# Altium PCB 贴锁控制板201028.PcbDoc
Units mm, origin at the board's own origin, x right, y up, seen from the top; angles counter-clockwise.
Board outline 47.43 x 32.39 mm, 2 copper layers (Top Layer, Bottom Layer); 73 components, 53 nets, 222 pads, 181 vias.
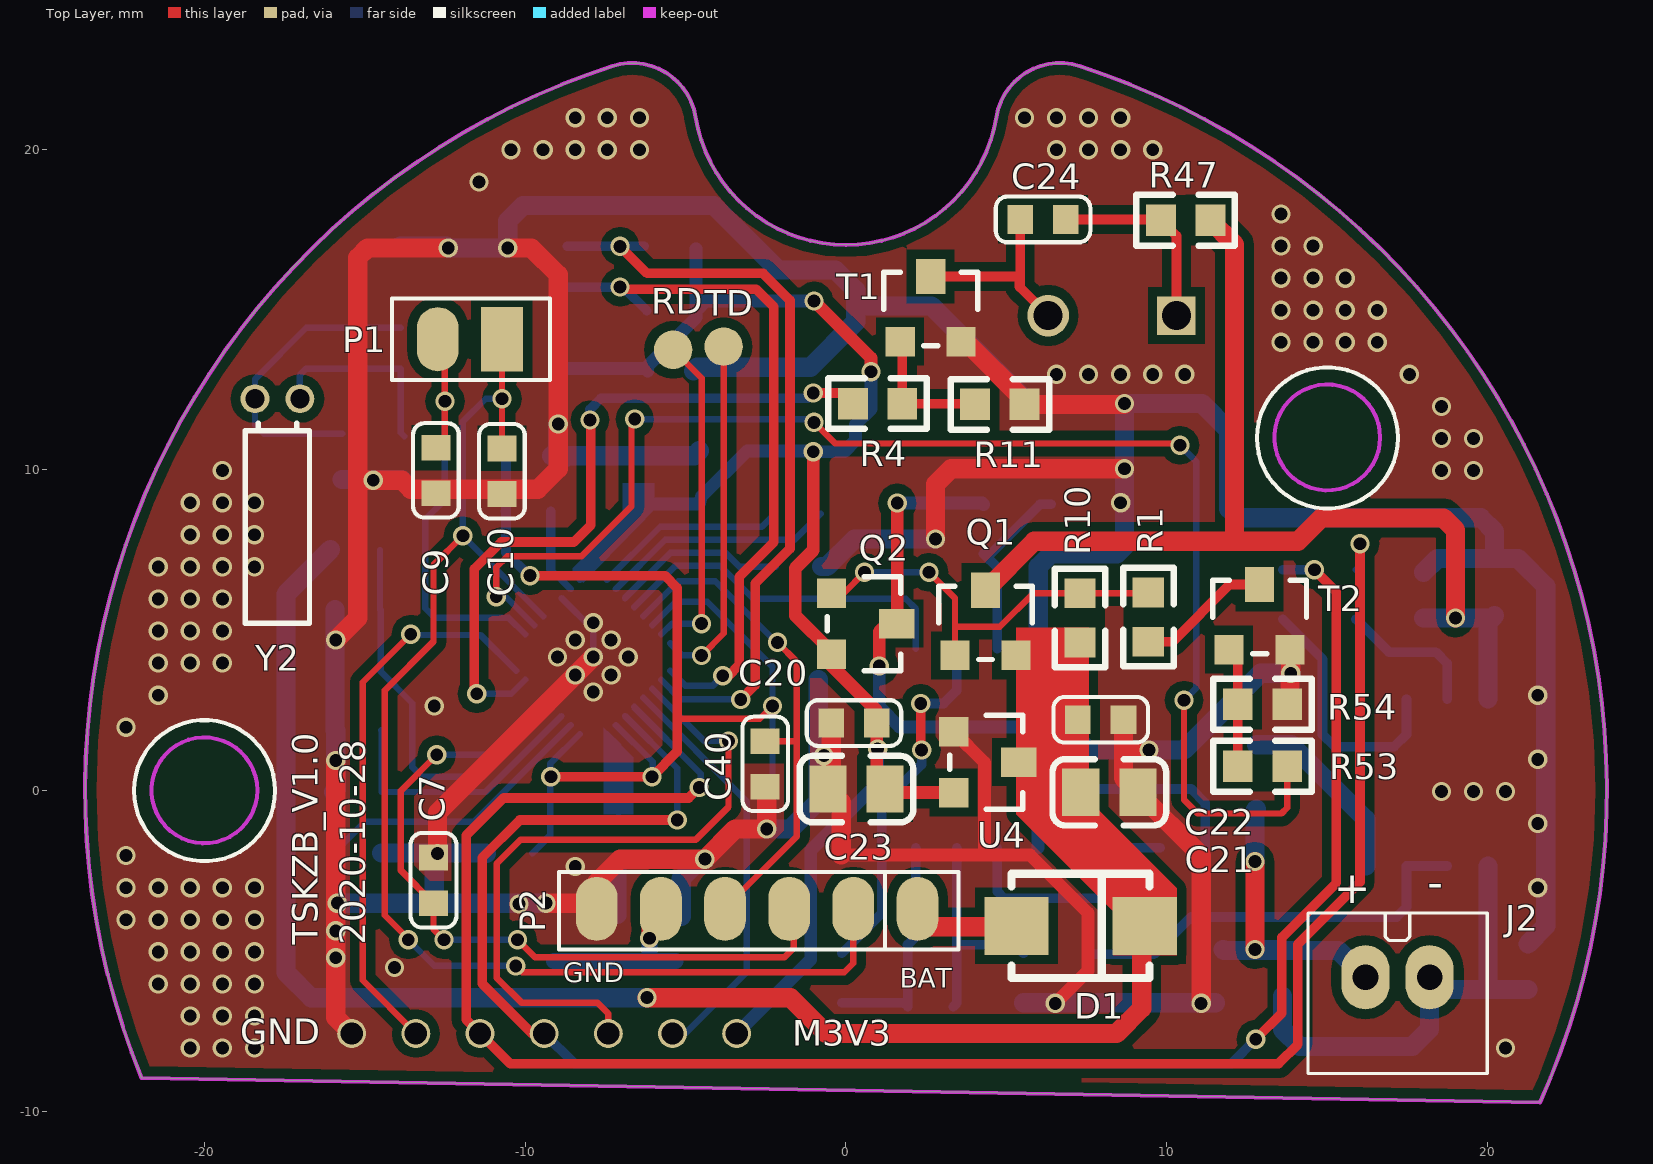
[diagram p0: Top Layer view]
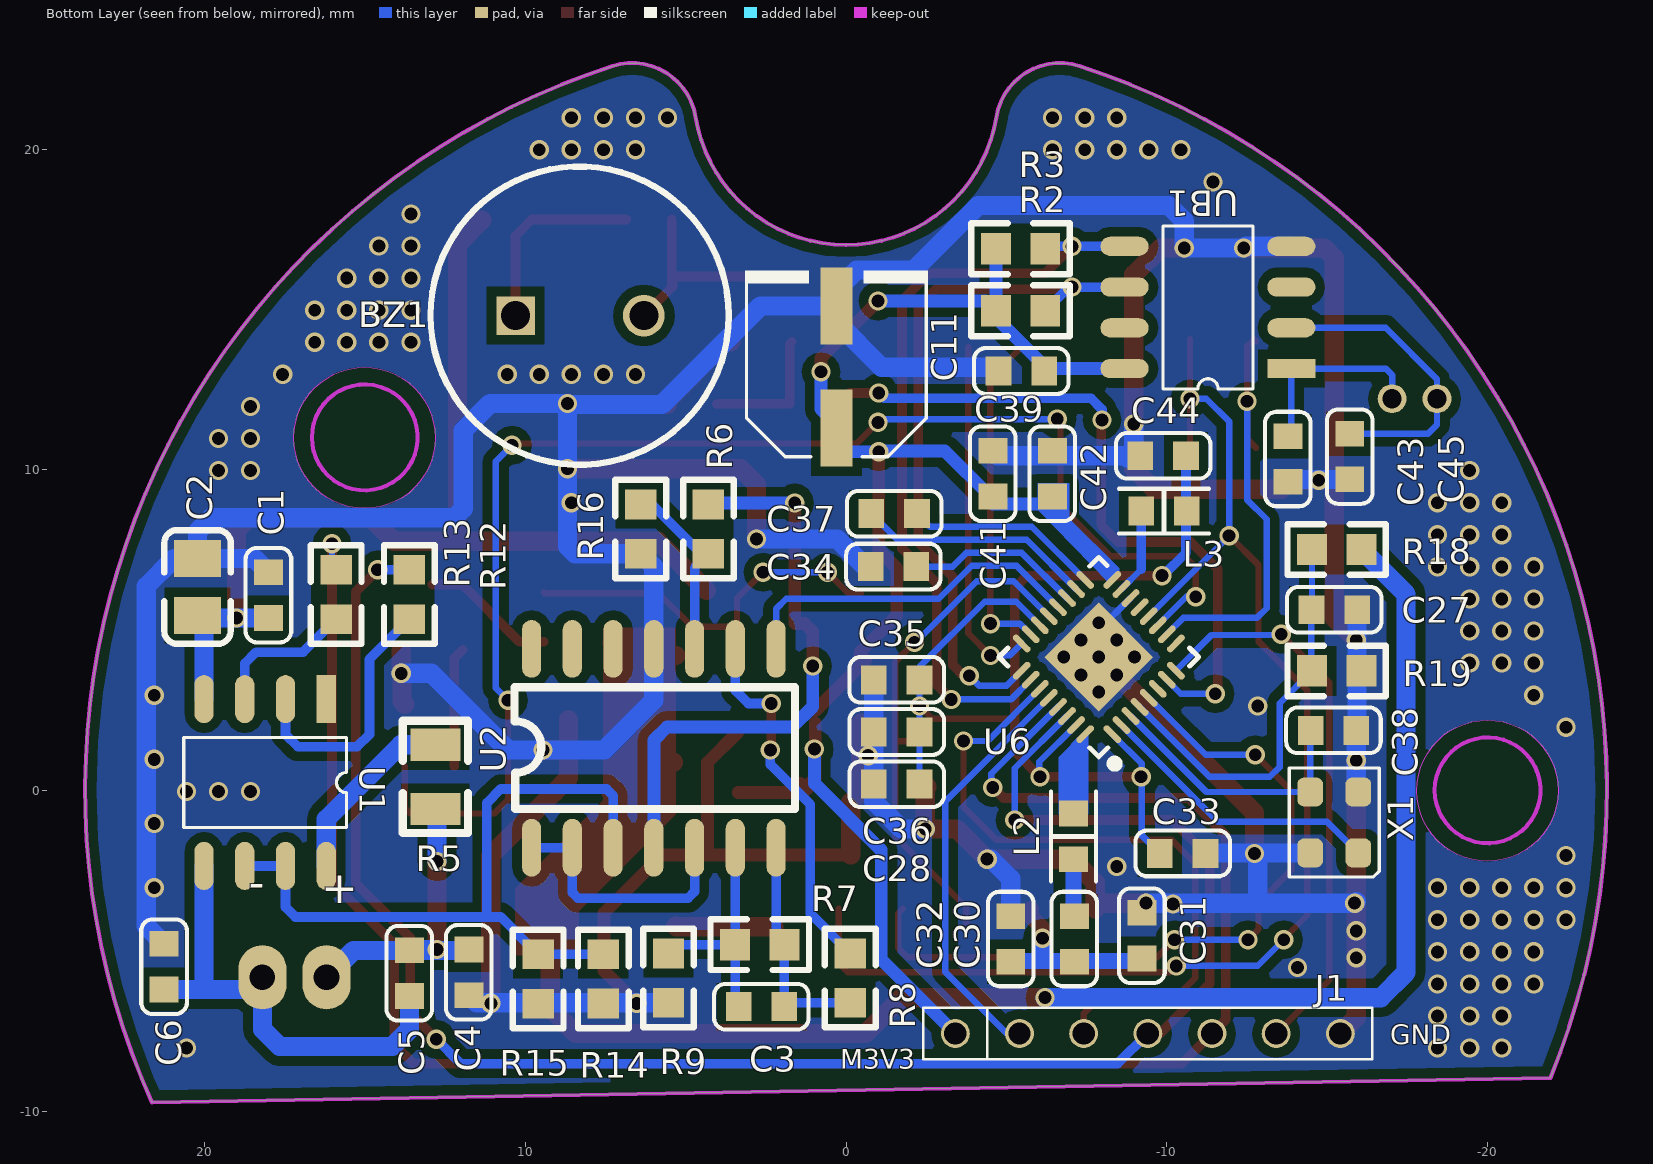
[diagram p1: Bottom Layer view, seen from below]
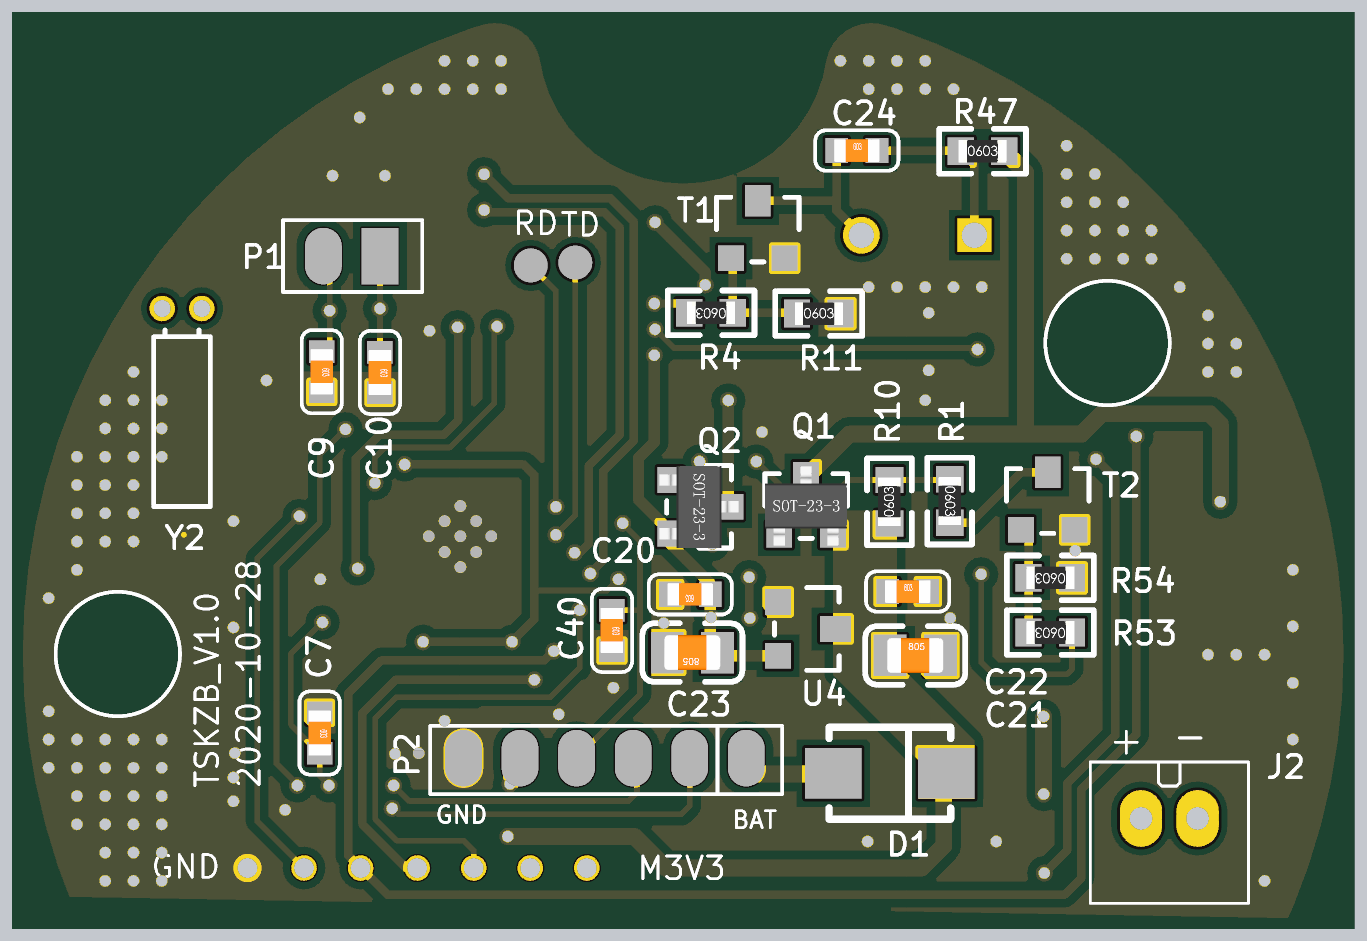
[diagram p2: 3D render of the assembled board from above, using the file's embedded part models]
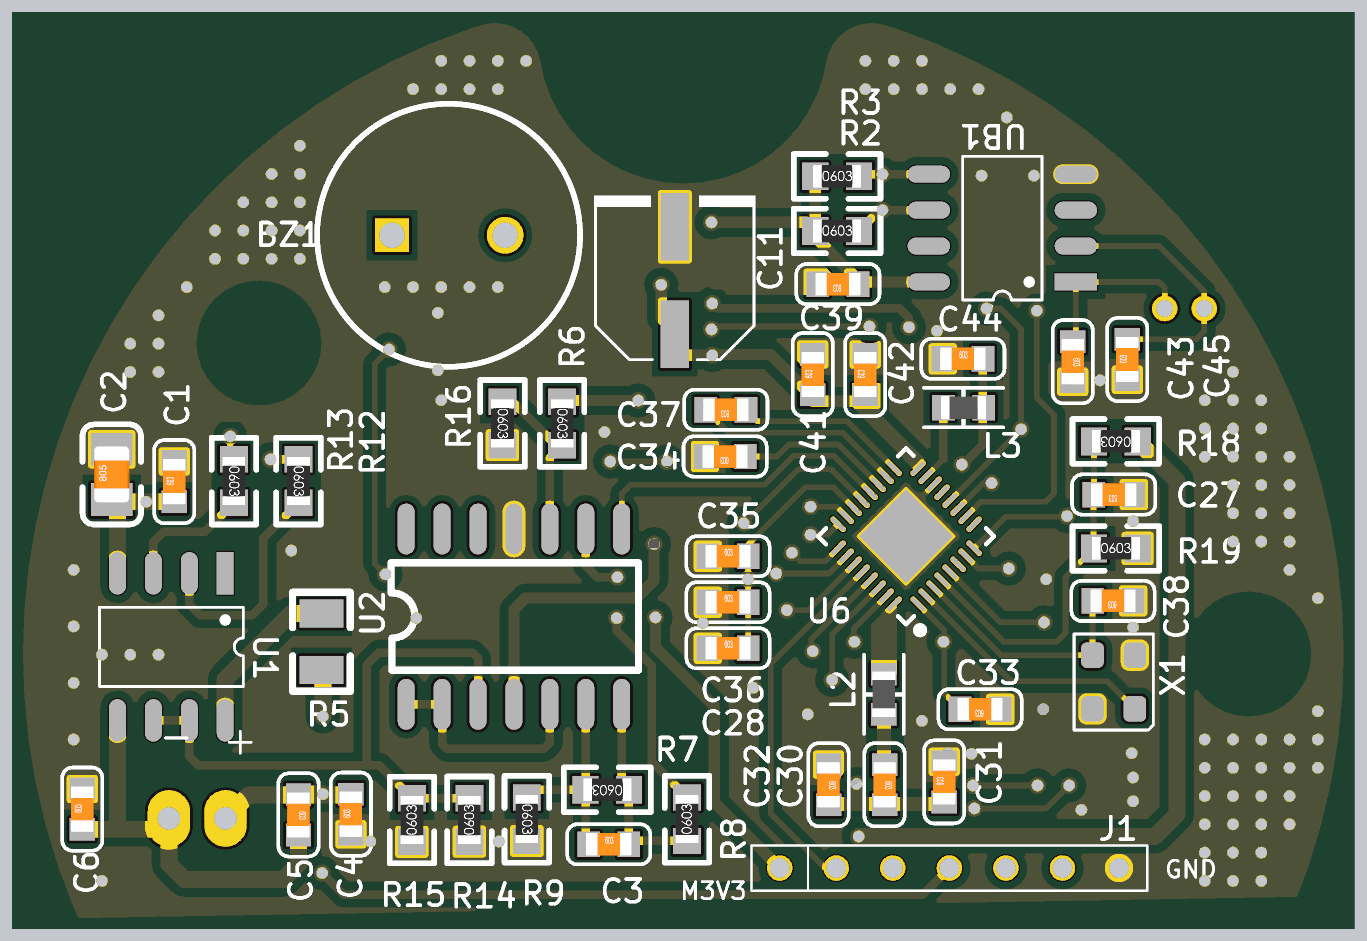
[diagram p3: 3D render of the assembled board from below, using the file's embedded part models]

## Layer stack, top to bottom
Top Layer: signal copper 0.0356
Dielectric: dielectric 0.32, FR-4, Dk 4.8
Bottom Layer: signal copper 0.0356

## Board outline
-21.952,-8.954 21.636,-9.715 ccw(c0.005,0.012) 7.281,22.585 ccw(c6.668,20.681) 4.694,21.001 cw(c0.005,21.762) -4.684,21.001 ccw(c-6.658,20.681) -7.272,22.585 ccw(c0.005,0.012)

## Design rules (kind name [scope] priority, off if disabled: settings)
Clearance Clearance_1 [All] p1 off: gap=0.3
Clearance [All] p2: gap=0.2
HoleToHoleClearance [All] p1: gap=0 allowstackedmicrovias=TRUE
MinimumSolderMaskSliver [All] p1: minsoldermaskwidth=0
PolygonConnect [All] p1: connectstyle=Direct reliefconductorwidth=0.254 reliefentries=4 polygonreliefangle="90 Angle" airgapwidth=0.254
RoutingVias [All] p1: holewidth=0.4 width=0.6 viastyle="Through Hole" minholewidth=0.3 minwidth=0.5 maxholewidth=0.4 maxwidth=0.6
SilkToSilkClearance [All] p1: silktosilkclearance=0
SilkToSolderMaskClearance [IsPad] p1: minsilkscreentomaskgap=0 clearancetoexposedcopper=TRUE
SolderMaskExpansion [All] p1: expansion=0.102
Width [All] p1: maxlimit=1.5 minlimit=0.1 preferedwidth=0.3
24 further rules are at their usual default settings.

## Components (designator, comment, footprint, x,y, rotation, side; value= is the part's Value field where it differs from the comment)
BZ1 "BUZZER" BUZZER_D93_L40 8.306,14.808 r180 bottom
C1 "0.1uF" 0603C 18.009,6.096 r90 bottom
C2 "22uF" LC-0805_C 20.218,6.35 r90 bottom
C3 "0.1uF" 0603C 2.642,-6.731 r180 bottom
C4 "100nF" 0603C 11.76,-5.664 r90 bottom
C5 "100nF" 0603C 13.614,-5.69 r270 bottom
C6 "100nF" 0603C 21.26,-5.486 r90 bottom
C7 "100nF" 0603C -12.852,-2.794 r270 top
C9 "100nF" 0603C -12.776,9.982 r270 top
C10 "100nF" 0603C -10.719,9.957 r270 top
C11 "220uF" R5*5.8 0.305,13.208 r90 bottom
C20 "0.1uF" 0603C 0.254,2.108 r180 top
C21 "22uF/10V" LC-0805_C 8.212,-0.051 r0 top
C22 "0.1uF" 0603C 7.945,2.21 r0 top
C23 "10uF/10V" LC-0805_C 0.33,0.051 r180 top
C24 "10uF/10V" 0603C 6.147,17.805 r0 top
C27 "1nF" 0603C -15.215,5.639 r0 bottom
C28 "1uF/6.3V" 0603C -1.575,0.203 r180 bottom
C30 "1.5pF" 0603C -7.112,-4.623 r270 bottom
C31 "NC" 0603C -9.22,-4.521 r90 bottom
C32 "1pF" 0603C -5.131,-4.623 r270 bottom
C33 "0.1uF" 0603C -10.49,-1.956 r0 bottom
C34 "0.1uF" 0603C -1.473,6.985 r0 bottom
C35 "1uF" 0603C -1.575,3.454 r180 bottom
C36 "0.1uF" 0603C -1.575,1.829 r180 bottom
C37 "0.1uF" 0603C -1.499,8.636 r0 bottom
C38 "2.7pF" 0603C -15.189,1.88 r0 bottom
C39 "0.1uF" 0603C -5.461,13.081 r0 bottom
C40 "1nF" 0603C -2.515,0.833 r270 top
C41 "10uF/6.3V" 0603C -4.572,9.881 r90 bottom
C42 "0.1uF" 0603C -6.426,9.881 r90 bottom
C43 "22pF" 0603C -13.767,10.338 r270 bottom
C44 "10uF/6.3V" 0603C -9.881,10.439 r180 bottom
C45 "22pF" 0603C -15.697,10.414 r90 bottom
D1 "SS14" DO-214AA 7.315,-4.216 r180 top
J1 "7P" "7P-2.0MM - duplicate" -3.404,-7.569 r180 bottom
J2 "CON2" 2PIN-2.0 17.196,-5.817 r180 top
L2 "2nH" 0603L -7.087,-1.422 r90 bottom
L3 "2.2uH" 0603L -9.906,8.712 r0 bottom
P1 "按键板接口" 2PH-2.0 -10.719,14.072 r180 top
P2 "设置板接口" B6B-PH 2.235,-3.683 r180 top
Q1 "SI2301" "SOT-23 - GDS" 4.351,5.232 r0 top
Q2 "SI2301" "SOT-23 - GDS" 0.567,5.207 r270 top
R1 "1K" LC-0603_R 9.431,5.41 r270 top
R2 "10K" LC-0603_R -5.436,14.961 r180 bottom
R3 "10K" LC-0603_R -5.436,16.891 r180 bottom
R4 "1K" LC-0603_R 0.991,12.065 r180 top
R5 "2.2R" 0805_R 12.802,0.432 r90 bottom
R6 "10K" LC-0603_R 4.293,8.153 r270 bottom
R7 "100K" LC-0603_R 2.692,-4.801 r0 bottom
R8 "100K" LC-0603_R -0.127,-5.842 r90 bottom
R9 "10K" LC-0603_R 5.537,-5.842 r270 bottom
R10 "100K" LC-0603_R 7.298,5.385 r90 top
R11 "10K" LC-0603_R 4.801,12.04 r0 top
R12 "10K" LC-0603_R 13.614,6.115 r270 bottom
R13 "10K" LC-0603_R 15.897,6.115 r270 bottom
R14 "0R68" LC-0603_R 7.569,-5.867 r90 bottom
R15 "0R68" LC-0603_R 9.601,-5.871 r90 bottom
R16 "100K" LC-0603_R 6.401,8.153 r270 bottom
R18 "500K%1" LC-0603_R -15.291,7.518 r0 bottom
R19 "100K%1" LC-0603_R -15.291,3.734 r180 bottom
R47 "10R" LC-0603_R 10.592,17.78 r0 top
R53 "1K" LC-0603_R 12.987,0.762 r180 top
R54 "10K" LC-0603_R 12.987,2.692 r180 top
T1 "SS8050" SOT-23-3L 2.642,15.011 r0 top
T2 "PMBT3904" SOT-23-3L 12.895,5.41 r0 top
U1 "CP2117" SOP8 18.11,0.254 r270 bottom
U2 "LMV324B-SR" SOIC-14_L8.7-W3.9-P1.27-LS6.0-BL 5.994,1.321 r180 bottom
U4 "HT7533" SOT-23-3L 4.377,0.889 r270 top
U6 "BK3431Q" QFN32_4*4*0.4 -7.874,4.166 r45 bottom
UB1 "PCF8563" SOP8 -11.278,15.062 r0 bottom
X1 "16MHZ" XTAL3225 -15.215,-0.991 r90 bottom
Y2 "32.768KHZ" 晶振-9 -17.018,12.217 r180 top

## Footprints (in the part's own frame and the unit in brackets; to place one, negate y for a bottom-side part, rotate by r counter-clockwise, add the part's x,y. Pads: shape width x height; smd on the part's side, far side on the other; paste and mask are expansions set on the pad)
2PH-2.0 [mm]
  rect 1.3x2 smd mask+0.05: 1(0,0)
  oval 1.3x2 smd mask+0.05: 2(2,0)
  silkscreen extent -1.5,-1.27 3.43,1.27
2PIN-2.0 [mm]
  oval 1.5x2 hole 0.8: 1(-1,0) 2(1,0)
  silkscreen extent -2.8,-2 2.79,3
"7P-2.0MM - duplicate" [mm]
  round 0.9 hole 0.7 mask+0.05: 1(0,0) 2(2,0) 3(4,0) 4(6,0) 5(8,0) 6(10,0) 7(12,0)
  silkscreen extent -1,-0.8 13,0.8
0603C [mm]
  rect 0.8x0.9 smd: 1(-0.711,0) 2(0.711,0)
  silkscreen extent -1.47,-0.71 1.47,0.71, body extent -0.8,-0.4 0.8,0.4, height 0.3
0603L [mm]
  rect 0.8x0.9 smd: 1(-0.711,0) 2(0.711,0)
  silkscreen extent -1.4,-0.7 1.4,0.7, body extent -0.82,-0.41 0.82,0.41, height 0.46
0805_R [mm]
  rect 1x1.55 smd: 1(-1,0) 2(1,0)
  silkscreen extent -1.75,-1.02 1.75,1.02
B6B-PH [mm]
  oval 1.3x2 smd mask+0.05: 1(0,0) 2(2,0) 3(4,0) 4(6,0) 5(8,0) 6(10,0)
  silkscreen extent -1.27,-1.14 11.18,1.27
BUZZER_D93_L40 [mm]
  rect 1.2x1.2 hole 0.9: 1(-2,0)
  round 1.3 hole 0.9: 2(2,0)
  silkscreen extent -4.65,-4.65 4.65,4.65
DO-214AA [mm]
  rect 2x1.8 smd: 1(2,0) 2(-2,0)
  silkscreen extent -2.15,-1.63 2.15,1.63
LC-0603_R [mm]
  rect 0.93x0.98 smd: 1(-0.77,0) 2(0.77,0)
  silkscreen extent -1.53,-0.79 1.54,0.79, body extent -0.85,-0.4 0.85,0.4, height 0.56
LC-0805_C [mm]
  rect 1.16x1.47 smd: 1(-0.89,0) 2(0.89,0)
  silkscreen extent -1.77,-1.04 1.77,1.04, body extent -1,-0.62 1,0.63, height 0.77
QFN32_4*4*0.4 [mm]
  rect 2.4x2.4 smd paste-0.025 mask+0.051: 0(0,0)
  oval 0.7x0.2 smd paste-0.025 mask+0.051: 1(-2,1.4) 2(-2,1) 3(-2,0.6) 4(-2,0.2) 5(-2,-0.2) 6(-2,-0.6) 7(-2,-1) 8(-2,-1.4) 17(2,-1.4) 18(2,-1) 19(2,-0.6) 20(2,-0.2) 21(2,0.2) 22(2,0.6) 23(2,1) 24(2,1.4)
  oval 0.2x0.7 smd paste-0.025 mask+0.051: 9(-1.4,-2) 10(-1,-2) 11(-0.6,-2) 12(-0.2,-2) 13(0.2,-2) 14(0.6,-2) 15(1,-2) 16(1.4,-2) 25(1.4,2) 26(1,2) 27(0.6,2) 28(0.2,2) 29(-0.2,2) 30(-0.6,2) 31(-1,2) 32(-1.4,2)
  silkscreen extent -2.82,-2.2 2.2,2.2
R5*5.8 [mm]
  rect 2.4x1 smd: 1(-1.9,0) 2(1.9,0)
  silkscreen extent -2.8,-2.85 3,2.85
SOIC-14_L8.7-W3.9-P1.27-LS6.0-BL [mm]
  oval 0.6x1.798 smd: 1(-3.81,-3.1) 2(-2.54,-3.1) 3(-1.27,-3.1) 4(0,-3.1) 5(1.27,-3.1) 6(2.54,-3.1) 7(3.81,-3.1) 8(3.81,3.1) 9(2.54,3.1) 10(1.27,3.1) 11(0,3.1) 12(-1.27,3.1) 13(-2.54,3.1) 14(-3.81,3.1)
  silkscreen extent -4.34,-1.9 4.4,1.91
SOP8 [mm]
  rect 1.5x0.6 smd mask+0.05: 1(-2.6,1.905)
  oval 1.5x0.6 smd mask+0.05: 2(-2.6,0.635) 3(-2.6,-0.635) 4(-2.6,-1.905) 5(2.6,-1.905) 6(2.6,-0.635) 7(2.6,0.635) 8(2.6,1.905)
  round 0.4 on Bottom Overlay mask+0.05: ""(-0.949,1.905)
  silkscreen extent -1.4,-2.54 1.4,2.54
"SOT-23 - GDS" [mil]
  rect 36x43.31 smd: D(0,40)
  rect 36x36 smd: G(-37.4,-40) S(37.4,-40)
  silkscreen extent -57,-45 58,45, body extent -57,-55 57,55, height 47
SOT-23-3L [mil]
  rect 36x36 smd: 1(-37.4,-40) 2(37.4,-40)
  rect 36x43.31 smd: 3(0,40)
  silkscreen extent -57,-45 58,45
XTAL3225 [mm]
  rrect50% 0.9x0.8 smd: 1(-0.95,-0.75) 2(0.95,-0.75) 3(0.95,0.75) 4(-0.95,0.75)
  silkscreen extent -1.7,-1.4 1.7,1.4
晶振-9 [mm]
  round 0.9 hole 0.6: 1(0,0) 2(1.4,0)
  rect 0x0 smd: 3(0.635,8)
  silkscreen extent -0.3,0.76 1.7,7

## Part data
BZ1: "Buzzer"
C1 C2 C3 C11 C20 C22 C27: library part CAP-NP, "Capacitor, Ceramic"
C4 C5 C6 C7 C9 C10: library part "CAP NP"
C21 C23: library part CAP-P, "Capacitor, tolerance ±20%"
C24: library part C_0_Dup1
C28 C30 C31 C32 C33 C34 C35 C36 C37 C38 C41 C42 C44: library part Cap, "Capacitor"
C39 C40 C43 C45: library part C
D1: library part D
L2 L3: "Power Inductor, 4.7uH, 0.7A, 260mR DCR"
P1: library part MHDR1X2, "Header, 2-Pin"
P2: library part "Header 6", "Header, 6-Pin"
Q1 Q2: library part PWRMOSFET_EP_DGS_0
R1 R6 R10 R16 R53 R54: library part R
R2 R3: library part RES
R4 R5 R11 R14 R15 R47: library part R_Dup1
R7 R8 R9 R12 R13: library part Pro71C3.TMP_UnNamed_1
R18 R19: library part Res2, "Resistor"
T1 T2: library part NPN_BJT, "Bipolar Junction Transistor"
U1: library part AM24LC02_0
U4: library part XC6206P302M
UB1: library part IC8
Y2: library part 晶振

## Free pads (board coordinates)
  round 1.2 smd: 0(-3.81,13.843) 1(-5.385,13.741)

## Via types
v1: diameter 0.6, hole 0.4, Top Layer to Bottom Layer, tented both sides, 181 vias

## Nets (pads, with @x,y where several pads share a name; then routed paths per layer and width w, separated by ;. In a path a pad name is that pad's centre, name@x,y a point inside that pad or via, vN(x,y) a via of type N, cw(c..) or ccw(c..) an arc to the next point about the centre after c; other vN are vias at no path point)
BAT_ADC: C27.2 R18.2 R19.1 U6.4 | length 12.6
  Bottom Layer w0.2: C27.2@-14.521,5.639 R18.2@-14.521,7.493 ; C27.2 -14.503,3.751 R19.1 -13.513,2.726 -13.513,0.737 -13.208,0.432 -11.325,0.432 U6.4
BEEP: R4.2 U6.7 | length 21.9
  Top Layer w0.3: v1(-11.506,3.023) -11.582,3.099 -11.582,6.91 -10.741,7.752 -8.479,7.752 -7.95,8.28 v1@-7.95,11.532 ; v1(-1.016,12.395) -0.11,12.395 R4.2
  Bottom Layer w0.2: v1(-11.506,3.023) -10.431,3.023 U6.7
  Bottom Layer w0.3: v1(-7.976,11.557) -7.976,11.887 -7.63,12.232 -1.179,12.232 v1(-1.016,12.395)
DECT_L_R: U6.6
EN_FAULT: U2.8 U6.20 | length 11.1
  Bottom Layer w0.2: U6.20 -5.312,7.01 -3.912,7.01 -2.886,5.985 1.864,5.985 2.184,5.664 U2.8
GND: C1.2 C2.2 C4.1 C6.2 C7.1 C9.2 C10.2 C11.2 C20.2 C21.2 C22.2 C23.2 C27.1 C28.1 C31.2 C32.1 C33.1 C34.2 C35.1 C36.1 C38.1 C39.2 C40.2 C41.2 C42.2 C43.2 C44.1 C45.1 J1.7 P2.6 R9.2 R11.2 R14.1 R15.1 R16.2 R19.2 R54.1 T1.2 T2.2 U2.11 U4.1 U6.0 U6.14 UB1.4 X1.2 X1.4 | length 232.3
  Top Layer w0.4: -0.146,-2.007 4.318,-2.007 ; U4.1 4.318,0.882 4.318,-2.007 ; v1(6.528,-6.629) 7.544,-5.613 7.544,-3.81 5.74,-2.007 4.318,-2.007
  Top Layer w0.6: v1(-15.9,0.94) v1@-15.9,-3.454 ; v1(-15.9,4.699) -15.215,5.385 -15.215,9.703 ; v1(-15.85,-3.505) v1@-15.9,-3.454 ; J1.7 -15.9,-7.072 v1@-15.9,-3.454 ; v1(-12.725,-1.956) -12.725,-0.686 v1(-8.433,3.607) v1(-7.874,4.166) ; v1(-12.395,16.916) -14.91,16.916 -15.215,16.612 -15.215,9.703 ; v1(-10.541,16.916) -9.804,16.916 -8.966,16.078 v1(-8.966,11.43) -8.966,10.033 -9.601,9.398 -13.564,9.398 -13.843,9.677 v1(-14.732,9.677) -15.189,9.677 -15.215,9.703 ; v1(-9.347,-3.505) -7.943,-3.505 P2.6 -7.765,-2.863 -7.036,-2.134 v1(-4.394,-2.134) -3.454,-1.194 v1(-2.464,-1.194) -2.464,0.071 C40.2 ; C20.2 -0.457,0.153 C23.2 -0.146,-0.363 -0.146,-2.007 ; v1(2.794,7.849) 2.794,9.55 3.277,10.033 v1(8.687,10.033) ; T1.2 3.737,13.995 5.571,12.162 R11.2 8.661,12.04 v1(8.687,12.065) ; C22.2 8.656,1.245 ; v1(9.449,1.27) 8.681,1.27 8.656,1.245 ; v1(11.074,-6.629) 11.074,-2.023 C21.2 8.656,0.396 8.656,1.245 ; R54.1 13.845,2.78 v1@13.845,3.658 ; v1(13.868,3.658) T2.2@13.868,4.371
  Bottom Layer w0.2: U6.14 -7.874,5.014 v1(-7.874,4.166)
  Bottom Layer w0.6: X1.2 -15.9,0.024 v1(-15.9,0.94) C38.1 ; C38.1@-15.926,1.88 C27.1 ; v1@-15.9,-3.454 v1(-15.85,-3.505) -12.929,-3.505 ; C45.1 -13.843,9.703 C43.2 ; X1.4 v1@-12.827,-1.941 ; UB1.4 -12.446,16.967 v1(-12.395,16.916) v1(-10.541,16.916) -10.541,17.755 -10.058,18.237 -4.115,18.237 -2.108,16.231 -0.33,16.231 0.305,15.596 C11.2 ; C33.1 -11.217,-1.941 v1@-12.827,-1.941 ; v1(-9.347,-3.505) -12.929,-3.505 ; C44.1 -8.966,10.643 v1(-8.966,11.43) ; C44.1@-8.788,10.363 -8.712,10.439 -4.724,10.439 C41.2 ; C32.1 -5.131,-2.743 -4.521,-2.134 v1(-4.394,-2.134) ; C39.2 -4.636,13.195 -1.105,13.195 0.305,14.605 C11.2 ; v1(-2.464,-1.194) -1.727,-1.194 -0.864,-0.33 C28.1 C36.1 C35.1 ; C34.2 -0.584,6.985 0.279,7.849 v1(2.794,7.849) ; R9.2 6.51,-6.612 v1(6.528,-6.629) ; v1@6.528,-6.612 C4.1@11.524,-6.612 ; v1(13.868,3.658) 12.929,3.658 10.541,1.27 v1(9.449,1.27) 7.544,1.27 5.994,2.819 U2.11 5.994,6.977 R16.2 8.45,7.383 8.687,7.62 v1(8.687,10.033) v1(8.687,12.065) ; C1.2 18.441,7.24 C2.2 ; C6.2 21.819,-4.216 21.819,6.375 20.954,7.24 C2.2 ; -12.929,-3.505 -12.827,-3.404 v1@-12.827,-1.941 ; C11.2 2.672,15.108 5.74,12.04 8.661,12.04 v1(8.687,12.065) ; v1(8.687,12.065) 11.1,12.065 11.938,11.227 11.938,8.788 12.217,8.509 19.787,8.509 20.218,8.077 C2.2
  other v1: -20.435,-8.024 -19.435,-8.024 -18.435,-8.024 20.565,-8.024 -20.435,-7.024 -19.435,-7.024 -18.435,-7.024 -21.435,-6.024 -20.435,-6.024 -19.435,-6.024 -18.435,-6.024 -14.072,-5.512 -15.9,-5.207 -21.435,-5.024 -20.435,-5.024 -19.435,-5.024 -18.435,-5.024 -15.9,-4.369 -22.435,-4.024 -21.435,-4.024 -20.435,-4.024 -19.435,-4.024 -18.435,-4.024 -10.185,-3.531 -22.435,-3.024 -21.435,-3.024 -20.435,-3.024 -19.435,-3.024 -18.435,-3.024 21.565,-3.024 -8.433,-2.362 -22.435,-2.024 21.565,-1.024 18.565,-0.024 19.565,-0.024 20.565,-0.024 21.565,0.976 -0.686,1.092 -22.435,1.976 -12.827,2.642 -21.435,2.976 21.565,2.976 -7.874,3.073 -7.315,3.607 -21.435,3.976 -20.435,3.976 -19.435,3.976 -8.992,4.166 -6.782,4.166 -8.433,4.699 -7.315,4.699 -21.435,4.976 -20.435,4.976 -19.435,4.976 -7.874,5.232 -21.435,5.976 -20.435,5.976 -19.435,5.976 -21.435,6.976 -20.435,6.976 -19.435,6.976 -18.435,6.976 -20.435,7.976 -19.435,7.976 -18.435,7.976 -20.435,8.976 -19.435,8.976 -18.435,8.976 8.565,8.976 -19.435,9.976 18.565,9.976 19.565,9.976 18.565,10.976 19.565,10.976 18.565,11.976 6.565,12.976 7.565,12.976 8.565,12.976 9.565,12.976 10.565,12.976 17.565,12.976 13.565,13.976 14.565,13.976 15.565,13.976 16.565,13.976 13.565,14.976 14.565,14.976 15.565,14.976 16.565,14.976 13.565,15.976 14.565,15.976 15.565,15.976 13.565,16.976 14.565,16.976 13.565,17.976 -11.435,18.976 -10.435,19.976 -9.435,19.976 -8.435,19.976 -7.435,19.976 -6.435,19.976 6.565,19.976 7.565,19.976 8.565,19.976 9.565,19.976 -8.435,20.976 -7.435,20.976 -6.435,20.976 5.565,20.976 6.565,20.976 7.565,20.976 8.565,20.976
KEYX_4: C10.1 P1.1 P2.2 U6.12 | length 42
  Top Layer w0.2: v1@-13.627,-4.635 -14.376,-3.886 -14.376,3.124 -12.852,4.648 -12.852,7.032 v1(-11.938,7.947) ; C10.1 v1(-10.719,12.217) P1.1 ; v1(-10.287,-5.461) -10.084,-5.664 -0.051,-5.664 0.235,-5.378 P2.2
  Bottom Layer w0.2: v1(-13.64,-4.648) -12.827,-5.461 v1(-10.287,-5.461) ; v1(-10.719,12.217) -11.227,12.217 -11.938,11.506 v1(-11.938,7.947) U6.12
KEYY_1: C7.2 P2.3 U6.5 | length 23.4
  Top Layer w0.2: v1(-12.751,1.118) -13.868,0 -13.868,-2.489 C7.2 -12.852,-4.318 v1(-12.522,-4.648) ; v1(-10.236,-4.648) -9.686,-5.198 -1.922,-5.198 -1.626,-4.902 -1.626,-3.822 P2.3
  Bottom Layer w0.2: v1(-12.751,1.118) -11.205,1.118 U6.5 ; v1(-12.522,-4.648) v1(-10.236,-4.648)
KEYY_3: C9.1 P1.2 U6.10 | length 13.8
  Top Layer w0.2: C9.1 -12.497,10.973 v1(-12.497,12.141) -12.497,13.85 P1.2 P1.2@-12.776,14.014
  Bottom Layer w0.2: v1(-12.497,12.141) -12.497,9.068 -13.106,8.458 -13.106,5.69 -12.802,5.385 -10.507,5.385 U6.10
M3V3: C11.1 C20.1 C23.1 C39.1 C41.1 C42.1 J1.1 Q2.S R2.1 R3.1 U4.2 U6.16 UB1.8 | length 51.9
  Top Layer w0.4: v1(-1.016,10.566) -1.016,7.493 -1.575,6.934 -1.575,5.46 -0.449,4.335 Q2.S ; v1(-0.991,15.265) 0.787,13.487 v1(0.787,13.056) ; Q2.S@-0.433,4.241 -0.61,4.064 C20.1@0.965,2.489 ; C20.1 0.965,0.39 1.22,0.135 C23.1 1.332,-0.061 U4.2 ; C23.1@1.279,0.076 C23.1@1.427,0.225
  Bottom Layer w0.2: U6.16 -6.426,8.442 C42.1
  Bottom Layer w0.3: C39.1@-6.256,13.157 C39.1@-6.206,13.106
  Bottom Layer w0.4: UB1.8 -6.256,13.157 C39.1@-6.248,13.157 ; C42.1 -6.198,8.941 -4.572,8.941 -4.496,9.169 -3.073,10.592 -1.041,10.592 v1(-1.016,10.566) -0.051,10.566 0.305,10.922 C11.1 0.305,11.41 0.787,11.892 v1(0.787,13.056) ; C39.1 -6.172,13.241 -4.666,14.748 R2.1 ; R3.1 R2.1 ; J1.1 -1.092,-5.258 -1.092,-1.854 0.991,0.229 v1(0.991,1.295) ; v1(-0.991,15.265) -4.361,15.265 R2.1
MOTO+: C4.2 C5.1 J2.2 R5.1 | length 10.1
  Top Layer w0.6: v1(12.751,-4.953) v1(12.751,-2.21)
  Bottom Layer w0.6: C4.2 11.786,-4.978 C5.1 ; v1(12.751,-4.953) 13.589,-4.953 C5.1 ; v1(12.751,-2.21) 12.751,-0.619 R5.1 ; J2.2 15.358,-4.978 C5.1
MOTO-: C5.2 C6.1 J2.1 U1.5 | length 14.8
  Bottom Layer w0.6: C5.2 13.614,-7.442 14.148,-7.976 17.653,-7.976 18.196,-7.433 J2.1 18.577,-6.198 20.142,-6.198 ; U1.5 20.015,-6.071 20.142,-6.198 ; C6.1 20.142,-6.198
NetBZ1_1: BZ1.1 C24.2 R47.1 | length 6.1
  Top Layer w0.3: C24.2 9.796,17.805 R47.1 10.306,17.296 BZ1.1
NetBZ1_2: BZ1.2 C24.1 T1.3 | length 6.5
  Top Layer w0.3: T1.3 5.41,16.027 5.41,15.704 5.436,15.678 ; C24.1 5.436,15.678 ; BZ1.2 5.436,15.678
NetC3_1: C3.1 R7.2 R9.1 U2.6 | length 7.2
  Bottom Layer w0.3: C3.1 3.454,-6.629 U2.6 ; R7.2 5.266,-4.801 R9.1
NetC3_2: C3.2 R7.1 R8.1 U2.7 | length 7.2
  Bottom Layer w0.3: R8.1 1.811,-6.612 C3.2 1.93,-4.809 R7.1 ; R7.1@1.93,-4.801 1.93,-4.793 2.184,-4.539 U2.7
NetC30_1: C30.1 L2.1 | length 1.8
  Bottom Layer w0.5: C30.1 -7.087,-3.886 L2.1
NetC34_1: C34.1 U6.19 | length 5.5
  Bottom Layer w0.2: U6.19 -5.478,7.41 -3.746,7.41 -3.321,6.985 C34.1
NetC37_1: C37.1 U6.17 | length 6.1
  Bottom Layer w0.2: U6.17 -5.79,8.23 -2.616,8.23 C37.1
NetC37_2: C37.2 U6.18 | length 7.4
  Bottom Layer w0.2: U6.18 -5.631,7.823 -1.6,7.823 C37.2
NetC38_2: C38.2 U6.3 X1.3 | length 8.5
  Bottom Layer w0.2: C38.2 -14.465,1.866 X1.3 -11.232,-0.041 U6.3
NetC43_1: C43.1 UB1.1 Y2.1 | length 6.1
  Bottom Layer w0.2: Y2.1 -17.018,12.954 -16.815,13.157 UB1.1 -13.878,11.16 C43.1
NetC45_2: C45.2 UB1.2 Y2.2 | length 9.5
  Bottom Layer w0.2: C45.2 -18.136,11.125 -18.418,11.408 Y2.2 -18.418,12.824 -16.815,14.427 UB1.2
NetD1_1: D1.1 P2.1 | length 3.1
  Top Layer w0.6: P2.1@2.261,-4.242 5.29,-4.242 D1.1
NetL2_2: L2.2 U6.32 | length 2.6
  Bottom Layer w0.2: U6.32 -7.087,1.398 L2.2
NetL3_2: L3.2 U6.15 | length 2.7
  Bottom Layer w0.2: -9.195,6.901 U6.15
  Bottom Layer w0.3: -9.195,6.901 L3.2
NetQ1_G: Q1.G Q2.G R1.1 R10.2 | length 12.7
  Top Layer w0.2: Q2.G -0.066,6.157 v1(0.584,6.807) ; v1(2.591,6.807) 3.401,5.997 3.401,5.103 ; Q1.G 3.401,5.103 ; R1.1 9.406,6.155 R10.2 5.85,6.155 4.801,5.105 3.404,5.105 3.401,5.103
  Bottom Layer w0.2: v1(0.584,6.807) v1(2.591,6.807)
NetR1_2: R1.2 T2.3 | length 4.2
  Top Layer w0.3: R1.2 10.177,4.64 11.963,6.426 T2.3
NetR4_1: R4.1 R11.1 T1.1 | length 4.2
  Top Layer w0.3: T1.1 1.761,13.926 R4.1 4.005,12.065 R11.1
NetR5_2: R5.2 U1.8 | length 5.8
  Bottom Layer w0.6: R5.2 13.884,1.432 16.205,-0.889 U1.8
NetR6_2: R6.2 R16.1 U2.10 | length 5.9
  Bottom Layer w0.3: U2.10 4.724,6.952 R6.2 4.513,7.383 6.053,8.923 R16.1
NetR8_2: R8.2 U2.9 | length 11.4
  Top Layer w0.3: v1(2.337,2.718) 2.337,1.295 v1(2.362,1.27)
  Bottom Layer w0.3: R8.2 1.118,-3.827 1.118,-0.432 2.362,0.813 v1(2.362,1.27) ; v1(2.337,2.718) 3.048,2.718 3.454,3.124 U2.9
NetR12_2: R12.2 U1.2 | length 8.1
  Bottom Layer w0.3: R12.2 14.859,4.1 14.859,1.753 15.24,1.372 17.094,1.372 17.475,1.753 U1.2
NetR13_2: R13.2 U1.3 | length 4.5
  Bottom Layer w0.3: R13.2 16.924,4.318 18.39,4.318 18.745,3.962 U1.3
NetR14_2: R14.2 R15.2 U1.6 U1.7 U2.3 | length 22.4
  Bottom Layer w0.3: U2.3 7.264,-0.152 7.468,0.051 10.77,0.051 11.201,-0.381 11.201,-3.937 ; R14.2 R15.2@9.598,-5.097 ; R15.2 10.765,-3.937 11.201,-3.937 ; U1.6 U1.7 17.475,-3.632 17.17,-3.937 11.201,-3.937
NetR53_2: R53.2 R54.2 T2.1 | length 3.7
  Top Layer w0.3: T2.1 12.217,4.122 R54.2 R53.2
NetU2_1: U2.1 U2.2 U2.5 | length 8
  Bottom Layer w0.3: U2.5 4.724,-3.15 4.928,-3.353 8.357,-3.353 8.534,-3.175 U2.2 U2.1
NetU6_2: U6.2 X1.1 | length 9
  Bottom Layer w0.2: X1.1 -14.989,-0.965 -11.591,-0.965 U6.2
P04/LED_RED: J1.3 U6.27 | length 21.2
  Top Layer w0.2: J1.3 -7.404,-6.947 -7.747,-6.604 -10.109,-6.604 -10.887,-5.826 -10.887,-2.276 -10.135,-1.524 -4.674,-1.524 -3.658,-0.508 v1(-3.658,1.549)
  Bottom Layer w0.2: U6.27 -4.409,1.549 v1(-3.658,1.549)
P05/LED_GREEN: J1.2 U6.28 | length 13
  Bottom Layer w0.2: U6.28 -3.083,-0.343 -3.083,-5.648 -5.004,-7.569 J1.2
P06/MOTO1: J1.5 R13.1 U6.29 | length 61
  Top Layer w0.3: v1(-4.572,0.102) -4.902,-0.229 -10.668,-0.229 -11.837,-1.398 -11.837,-7.136 J1.5 -10.464,-8.509 13.487,-8.509 14.089,-7.907 14.089,-4.783 16.027,-2.845 v1(16.027,7.696)
  Bottom Layer w0.2: U6.29 -4.521,0.53 v1@-4.521,0.102 ; R13.1 16.027,7.015 v1(16.027,7.696)
P07/MOTO0: J1.4 R12.1 U6.30 | length 57
  Top Layer w0.3: J1.4 -9.78,-7.569 -11.337,-6.013 -11.337,-2.09 -10.161,-0.914 v1(-5.258,-0.914) ; v1(12.776,-7.747) 13.589,-6.934 13.589,-4.576 15.291,-2.874 15.291,6.198 v1(14.603,6.885)
  Bottom Layer w0.2: U6.30 -5.258,0.701 v1(-5.258,-0.914) v1@-5.258,-1.092
  Bottom Layer w0.3: J1.4 -8.464,-8.509 12.014,-8.509 v1(12.776,-7.747) ; R12.1 v1(14.603,6.885)
PWR_CTL: R53.1 U6.11 | length 43.7
  Top Layer w0.2: v1(-10.897,6.045) -10.897,6.96 -10.554,7.302 -8.243,7.302 -6.68,8.865 -6.68,11.481 v1(-6.579,11.582) ; v1(-0.991,11.481) -0.33,10.82 10.363,10.82 v1(10.414,10.77) ; v1(10.541,2.819) 10.541,-0.279 10.973,-0.711 13.58,-0.711 13.757,-0.533 R53.1
  Bottom Layer w0.2: v1(-10.897,6.045) -10.602,6.045 U6.11 ; v1(-6.579,11.582) -1.092,11.582 v1(-0.991,11.481) ; v1(10.414,10.77) 10.922,10.262 10.922,3.2 v1(10.541,2.819)
RD1_KEYX_2: pad.1 U6.23 | length 10.3
  Top Layer w0.2: pad.1 -4.496,12.852 v1(-4.496,5.207)
  Bottom Layer w0.2: U6.23 -5.418,5.207 v1(-4.496,5.207)
RSTN: J1.6 U6.8 | length 17.5
  Top Layer w0.2: v1(-13.564,4.877) -15.062,3.378 -15.062,-5.911 J1.6
  Bottom Layer w0.2: v1(-13.564,4.877) -13.538,4.851 -11.388,4.851 U6.8
RX2/SETKEY: C40.1 P2.4 U6.21 | length 16.4
  Top Layer w0.2: P2.4@-3.739,-4.216 -3.739,-3.638 -1.524,-1.422 -1.524,1.524 ; C40.1 -1.545,1.545 -1.524,1.524 ; v1(-2.134,4.623) -1.524,4.013 -1.524,1.524
  Bottom Layer w0.2: U6.21 -5.229,6.528 -4.071,6.528 -2.166,4.623 v1(-2.134,4.623)
SCL: R2.2 U6.25 UB1.6 | length 22
  Top Layer w0.3: v1(-7.036,15.697) -6.964,15.626 -2.791,15.626 -2.242,15.077 -2.242,7.752 -3.327,6.667 -3.327,3.912 -3.658,3.581 v1(-3.835,3.581)
  Bottom Layer w0.2: U6.25 -5.005,3.277 -4.14,3.277 v1(-3.835,3.581)
  Bottom Layer w0.3: UB1.6 -6.942,15.697 R2.2
SDA: R3.2 U6.26 UB1.5 | length 24.2
  Top Layer w0.3: v1(-7.036,16.967) -6.194,16.125 -2.584,16.125 -1.742,15.284 -1.742,7.545 -2.827,6.459 -2.827,3.294 v1(-3.277,2.845)
  Bottom Layer w0.2: U6.26 -5.139,2.845 v1(-3.277,2.845)
  Bottom Layer w0.3: UB1.5 v1(-7.036,16.967) R3.2@-6.282,16.967
TD1_KEYX_1: pad.0 U6.24 | length 11
  Top Layer w0.2: v1(-4.496,4.216) -3.81,4.902 pad.0
  Bottom Layer w0.2: U6.24 -5.096,4.216 v1(-4.496,4.216)
TIANX: C30.2 C31.1 C32.2 P2.5 | length 5.6
  Top Layer w0.5: v1(-6.121,-4.598) -6.121,-4.294 -5.765,-3.937 P2.5
  Bottom Layer w0.5: C31.1@-9.093,-5.309 -6.071,-5.309 ; v1(-6.121,-4.598) -6.121,-5.258 -6.071,-5.309 ; C32.2@-5.309,-5.309 -6.071,-5.309
V6V: C1.1 C2.1 Q1.D R47.2 U1.4 | length 33.6
  Top Layer w0.6: Q1.D 5.875,7.772 12.116,7.772 ; R47.2 12.116,17.026 12.116,7.772 ; v1(18.999,5.385) 18.999,8.128 18.631,8.496 14.821,8.496 14.097,7.772 12.116,7.772
  Bottom Layer w0.6: C1.1 v1(18.999,5.385) C2.1@20.143,5.385 ; U1.4 20.015,5.257 C2.1@20.143,5.385 ; C2.1 C2.1@20.143,5.385
VBAT: C21.1 C22.1 D1.2 Q1.S R10.1 R18.1 U4.3 | length 60.9
  Top Layer w0.6: v1(-6.198,-6.452) -1.727,-6.452 -0.61,-7.569 8.433,-7.569 9.22,-6.782 9.22,-4.311 D1.2 6.274,-1.175 6.274,-0.102 ; Q1.S 6.223,4.216 6.274,4.166 6.274,0.889 ; U4.3 6.274,0.889 ; C22.1 6.35,2.21 6.299,2.159 6.299,4.14 6.774,4.615 R10.1 ; C21.1 6.325,-0.051 6.274,-0.102 ; 6.274,-0.102 6.274,0.889
  Bottom Layer w0.6: R18.1 -17.45,6.129 -17.45,-5.664 -16.662,-6.452 v1(-6.198,-6.452)
VDD: C28.2 C33.2 C35.2 C36.2 C44.2 L3.1 U6.1 U6.22 U6.31 | length 36.1
  Top Layer w0.2: -5.258,2.311 -5.191,2.245 -2.683,2.245 v1(-2.286,2.642)
  Top Layer w0.3: v1(-9.845,6.702) -5.635,6.702 -5.258,6.325 -5.258,2.311 -5.258,1.219 v1(-6.045,0.432) v1(-9.195,0.432)
  Bottom Layer w0.2: C33.2 -9.22,-1.397 -9.22,0.127 ; v1@-9.22,0.432 -9.22,0.84 U6.1 ; U6.31 -6.02,0.897 v1@-6.02,0.33 ; U6.22 -5.298,5.893 -4.318,5.893 -2.286,3.861 C35.2 v1(-2.286,2.642) C36.2 C28.2
  Bottom Layer w0.3: L3.1 L3.1@-10.592,8.738 ; C44.2 L3.1@-10.592,8.738 ; v1(-9.845,6.702) -9.877,6.702 -10.592,7.417 L3.1@-10.592,8.738
VDD3V3: Q2.D R6.1 U2.4 | length 18.2
  Top Layer w0.4: v1(1.041,3.886) 1.041,4.953 1.295,5.207 Q2.D 1.6,5.224 v1(1.6,8.966)
  Bottom Layer w0.4: v1(1.041,3.886) 1.041,2.616 1.676,1.981 5.588,1.981 5.994,1.575 U2.4 ; v1(1.6,8.966) 4.25,8.966 R6.1
pads on no net: U1. U1.1 U2.12 U2.13 U2.14 U6.9 U6.13 UB1. UB1.3 UB1.7 Y2.3

## Polygon pours and split planes (outlines as drawn)
GND on Top Layer "Top Layer-No Net" (solid, remove dead copper, pour order 4): -24.74,23.19 -24.74,-10.008 24.486,-10.008 24.663,-9.83 24.663,23.114
GND on Bottom Layer "Top Layer-No Net" (solid, remove dead copper, pour order 3): -24.79,23.393 -24.79,-9.804 24.435,-9.804 24.613,-9.627 24.613,23.317

## Keep-outs
Keep-Out Layer:
  circle w0.127: c-19.995,0.012 r1.65
  circle w0.127: c15.005,11.012 r1.65
  pour cut-out: 12.811,10.998 ccw(c15.011,10.998) 15.011,8.798 ccw(c15.011,10.998) 17.211,10.998 ccw(c15.011,10.998) 15.011,13.198 ccw(c15.011,10.998)
  pour cut-out: -22.19,0 ccw(c-19.99,0) -19.99,-2.2 ccw(c-19.99,0) -17.79,0 ccw(c-19.99,0) -19.99,2.2 ccw(c-19.99,0)
  lines w0.127: -21.952,-8.954 cw(c0.005,0.012) -7.272,22.585 cw(c-6.658,20.681) -4.684,21.001 ccw(c0.005,21.762) 4.694,21.001 cw(c6.668,20.681) 7.281,22.585 cw(c0.005,0.012) 21.636,-9.715 -21.952,-8.954

## Other copper
Top Layer:
  region net VBAT: 8.331,-5.131 8.331,-3.759 5.309,-0.737 5.309,5.08 7.569,5.08 7.569,-0.305 10.312,-3.048 10.312,-5.131
  pour cut-out: -6.553,-5.817 -6.375,-5.994 -3.454,-5.994 -3.353,-5.893 -3.353,-3.175 -3.556,-2.972 -6.35,-2.972 -6.553,-3.175
Bottom Layer:
  region net M3V3: -8.186,6.483 -8.509,6.806 -8.509,6.934 -6.96,8.484 -6.96,9.576 -5.969,9.576 -5.969,8.751
  region net NetL2_2: -7.544,-0.737 -7.544,1.956 -6.629,1.041 -6.629,-0.737
  pour cut-out: -7.798,1.981 -7.798,-5.842 -7.696,-5.944 -4.572,-5.944 -4.496,-5.867 -4.496,-4.801 -4.572,-4.724 -6.35,-4.724 -6.452,-4.623 -6.452,1.895 -6.467,1.895 -6.553,1.981

## Silkscreen, mask and mechanical layers (free items; w line width, h text height)
Top Overlay:
  circle w0.127: c-19.99,0 r2.2
  circle w0.127: c15.011,10.998 r2.2
  text "RD" at -6.071,14.859 h0.8
  text "TD" at -4.394,14.808 h0.8
  text "-" at 18.618,-3.353 h1
  text "+" at 16.358,-3.505 h1
  text "TSKZB_V1.0" at -16.459,-4.801 h0.8 r90
  text "2020-10-28" at -14.986,-4.801 h0.8 r90
  text "GND" at -8.814,-5.969 h0.6
  text "BAT" at 1.676,-6.147 h0.6
  text "GND" at -18.872,-7.899 h0.8
  text "M3V3" at -1.676,-7.95 h0.8
Bottom Overlay:
  text "-" at 18.618,-3.353 h1
  text "+" at 16.358,-3.505 h1
  text "GND" at -16.967,-7.899 h0.6
  text "M3V3" at 0.178,-8.661 h0.6